# EAGLE board DIYpiano (EAGLE 9.2.2)
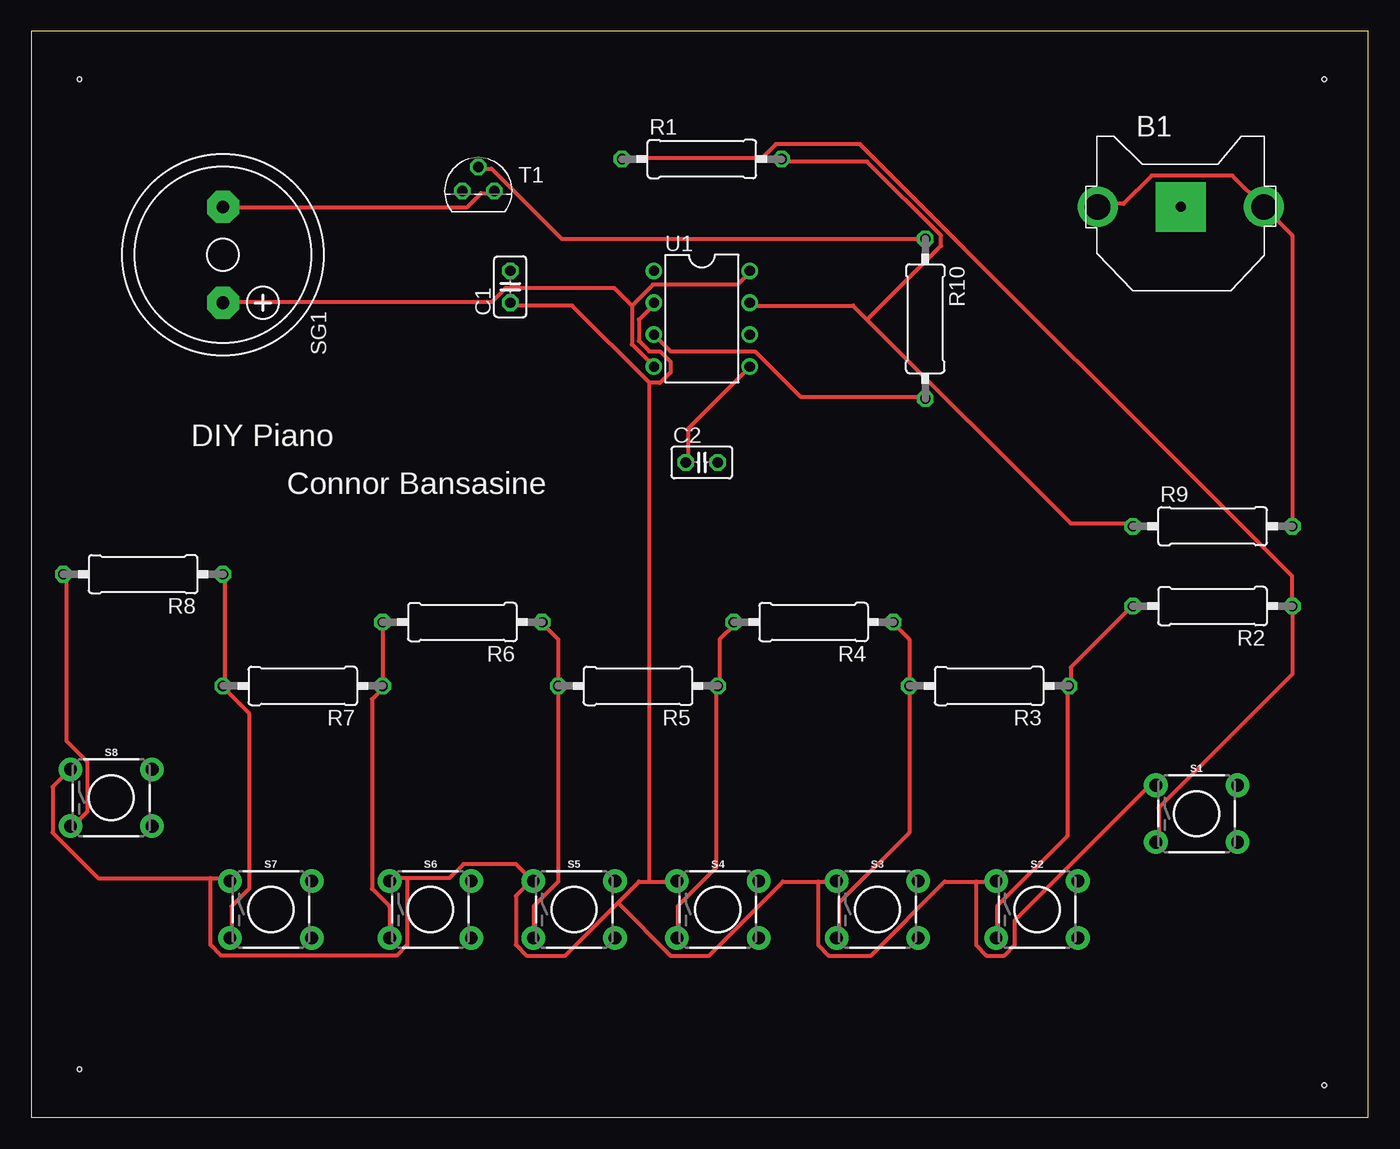
[diagram p0: board, top side]
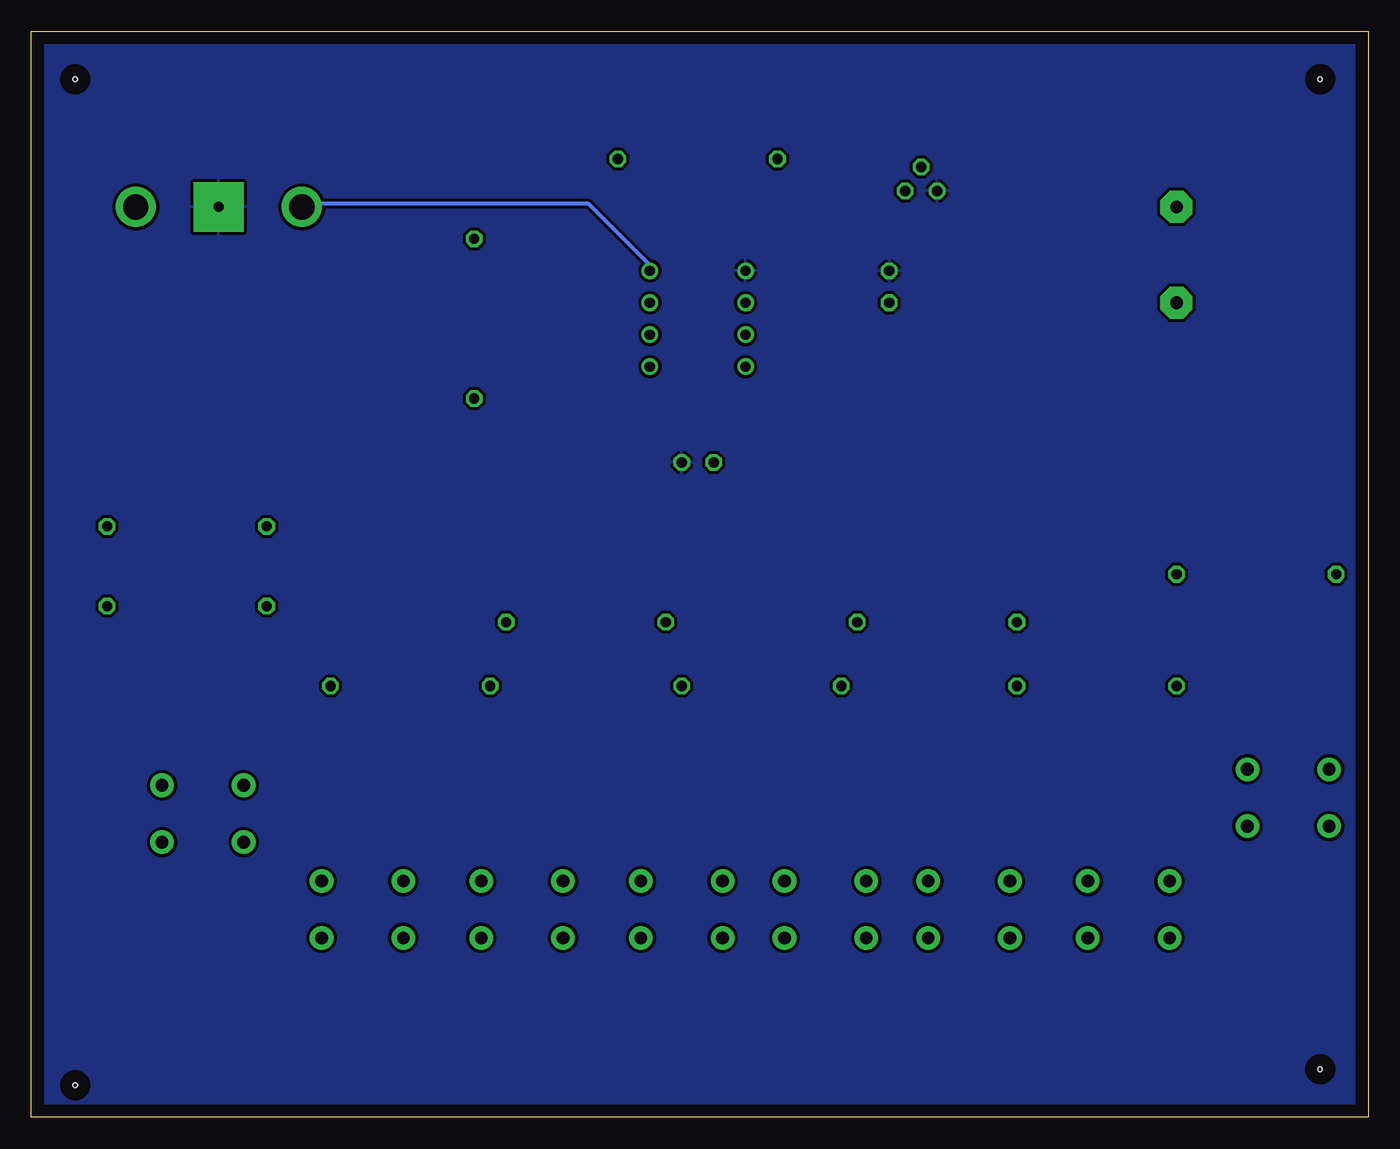
[diagram p1: board, bottom side, seen from below]

Size 106.35 x 86.35 mm. Coordinates in mm from the lower left corner, seen from the top.
Outline: 0,0 106.35,0 106.35,86.35 0,86.35 0,0
Copper layers (1*16): Top 0.035mm / dielectric 1.5mm / Bottom 0.035mm
Design rules "default": minimum track width 6mil, minimum drill 0.35mm, track to track 6mil, track to pad 6mil, pad to pad 6mil, via to via 6mil, smd to smd 6mil, copper to edge 40mil, drill to drill 6mil, minimum pad ring 10mil, minimum via ring 8mil, stop-mask expansion 4mil, vias tented up to drill 0mil, thermal gap 10mil
Net classes: 0 default: width 0.305 mm, drill 0.508 mm, clearance 0.254 mm
Holes 0.35 mm at 3.81,82.55 3.81,3.81 102.87,2.54 102.87,82.55

## Footprints (pad centres in the part's own frame; a part is rotated, then mirrored left to right if it is on the bottom)
CR1220-THM = drill 2 pad 3.175: +1 -6.604,0; +2 6.604,0 | drill 0.8 pad 3.962 square: - 0,0
C025-025X050 = drill 0.813 octagon: 1 -1.27,0; 2 1.27,0
0309/12 = drill 0.813 octagon: 1 -6.35,0; 2 6.35,0
TACTILE_SWITCH_PTH_6.0MM = drill 1.016 pad 1.88: 1 -3.251,2.261; 2 3.251,2.261; 3 -3.251,-2.261; 4 3.251,-2.261
F/HMB = drill 1.016 pad 2.54 octagon: + 3.81,0; - -3.81,0
TO92 = drill 0.813 octagon: 1 1.27,0; 2 0,1.905; 3 -1.27,0
DIL08 = drill 0.813 pad 1.27: 1 -3.81,-3.81; 2 -1.27,-3.81; 3 1.27,-3.81; 4 3.81,-3.81; 5 3.81,3.81; 6 1.27,3.81; 7 -1.27,3.81; 8 -3.81,3.81

## Placement (x,y rotation side)
B1  3V  [CR1220-THM]  91.44,72.39 0 top
C1  [C025-025X050]  38.1,66.04 90 top
C2  [C025-025X050]  53.34,52.07 0 top
R1  6.2k  [0309/12]  53.34,76.2 0 top
R2  390  [0309/12]  93.98,40.64 180 top
R3  910  [0309/12]  76.2,34.29 180 top
R4  1k  [0309/12]  62.23,39.37 180 top
R5  1.1k  [0309/12]  48.26,34.29 180 top
R6  620  [0309/12]  34.29,39.37 180 top
R7  1.3k  [0309/12]  21.59,34.29 180 top
R8  1.5k  [0309/12]  8.89,43.18 180 top
R9  1k  [0309/12]  93.98,46.99 0 top
R10  1k  [0309/12]  71.12,63.5 270 top
S1  MOMENTARY-SWITCH-SPST-PTH-6.0MM  [TACTILE_SWITCH_PTH_6.0MM]  92.71,24.13 0 top
S2  MOMENTARY-SWITCH-SPST-PTH-6.0MM  [TACTILE_SWITCH_PTH_6.0MM]  80.01,16.51 0 top
S3  MOMENTARY-SWITCH-SPST-PTH-6.0MM  [TACTILE_SWITCH_PTH_6.0MM]  67.31,16.51 0 top
S4  MOMENTARY-SWITCH-SPST-PTH-6.0MM  [TACTILE_SWITCH_PTH_6.0MM]  54.61,16.51 0 top
S5  MOMENTARY-SWITCH-SPST-PTH-6.0MM  [TACTILE_SWITCH_PTH_6.0MM]  43.18,16.51 0 top
S6  MOMENTARY-SWITCH-SPST-PTH-6.0MM  [TACTILE_SWITCH_PTH_6.0MM]  31.75,16.51 0 top
S7  MOMENTARY-SWITCH-SPST-PTH-6.0MM  [TACTILE_SWITCH_PTH_6.0MM]  19.05,16.51 0 top
S8  MOMENTARY-SWITCH-SPST-PTH-6.0MM  [TACTILE_SWITCH_PTH_6.0MM]  6.35,25.4 0 top
SG1  F/HMB  [F/HMB]  15.24,68.58 270 top
T1  2N3565  [TO92]  35.56,73.66 0 top
U1  NE555N  [DIL08]  53.34,63.5 270 top

## Library data of the parts
B1 = adafruit; SPICEPREFIX: J
C1 C2 = rcl; SPICEPREFIX: C
R1-R10 = rcl; SPICEPREFIX: R
S1-S8 = SparkFun-Switches; PROD_ID: SWCH-08441; SF_SKU: COM-00097
SG1 = buzzer; OC_FARNELL: unknown; OC_NEWARK: unknown
T1 = transistor
U1 = linear; SPICEPREFIX: X

## Nets
GND: B1.- C1.2 C2.2 T1.3 U1.1
N$1: R5.2 R6.1 S5.3
N$2: R7.2 R8.1 S7.3
N$3: R10.2 U1.3
N$4: R1.2 R9.1 U1.7
N$5: R1.1 R2.1 S1.3
N$6: R2.2 R3.1 S2.3
N$7: R3.2 R4.1 S3.3
N$8: R4.2 R5.1 S4.3
N$9: R6.2 R7.1 S6.3
N$10: R8.2 S8.3
N$11: C2.1 U1.5
N$12: C1.1 S1.1 S2.1 S3.1 S4.1 S5.1 S6.1 S7.1 S8.1 U1.2
N$13: R10.1 T1.2
N$14: SG1.- T1.1
VCC: B1.+1 B1.+2 R9.2 SG1.+ U1.4 U1.8

## Tracks (layer width: path | path; a pad name or v marks a point on that pad's centre or on a via)
GND
  pour Bottom: -3.81,1.27 -3.81,87.63 -2.54,88.9 111.76,88.9 111.76,-1.27 110.49,-2.54 0,-2.54 -2.54,0
N$1
  Top 0.305: R6.1 40.79,39.12 41.91,38 R5.2 41.91,18.72 39.95,16.76 39.95,14.25 S5.3
N$2
  Top 0.305: R8.1 15.37,43.03 15.37,34.37 R7.2 15.37,34.09 17.32,32.13 17.32,18.16 15.93,16.76 15.93,14.25 S7.3
N$3
  Top 0.305: U1.3 50.85,60.91 57.56,60.91 61.19,57.28 70.97,57.28 R10.2
N$4
  Top 0.305: 66.5,63.42 65.38,64.54 57.28,64.54 U1.7 | 66.5,63.42 82.7,47.22 87.45,47.22 R9.1 | 66.5,63.42 72.36,69.29 72.36,70.13 66.5,76 59.79,76 R1.2
N$5
  Top 0.305: R1.1 47.22,76.28 58.12,76.28 59.23,77.39 65.94,77.39 100.31,43.03 100.31,40.79 R2.1 100.31,40.51 100.31,35.2 89.69,24.59 89.69,22.07 S1.3
N$6
  Top 0.305: R2.2 87.45,40.51 82.7,35.76 82.7,34.37 R3.1 82.42,34.09 82.42,22.35 76.83,16.76 76.83,14.25 S2.3
N$7
  Top 0.305: R4.1 68.73,39.12 69.85,38 R3.2 69.85,22.63 64.26,17.04 64.26,14.25 S3.3
N$8
  Top 0.305: R4.2 55.88,39.12 54.76,38 54.76,34.37 R5.1 54.48,34.09 54.48,19.84 51.41,16.76 51.41,14.25 S4.3
N$9
  Top 0.305: R6.2 R7.1 27.94,34.09 27.1,33.25 27.1,18.16 28.5,16.76 S6.3
N$10
  Top 0.305: R8.2 2.79,43.03 2.79,29.9 4.47,28.22 4.47,24.31 3.35,23.19 S8.3
N$11
  Top 0.305: C2.1 52.25,52.25 52.25,54.76 57,59.51 U1.5
N$12
  Top 0.305: 14.25,19 5.31,19 1.68,22.63 1.68,26.26 3.07,27.66 S8.1 | 14.25,19 15.65,19 S7.1 | 49.17,58.4 43.03,64.54 38.28,64.54 C1.1 | 49.17,58.4 50.01,58.4 50.85,59.23 50.85,60.07 50.01,60.91 49.17,60.91 48.34,61.75 48.34,63.42 49.45,64.54 U1.2 | 29.9,19 33.25,19 34.37,20.12 38.56,20.12 39.67,19 S5.1 39.67,18.72 38.56,17.6 38.56,13.69 39.4,12.85 42.47,12.85 46.66,17.04 | 29.9,19 28.5,19 S6.1 | 49.17,18.72 48.34,18.72 46.66,17.04 | 49.17,18.72 51.13,18.72 S4.1 | 62.59,18.72 59.79,18.72 53.92,12.85 50.85,12.85 46.66,17.04 | 62.59,18.72 63.98,18.72 S3.1 | 75.16,18.72 72.64,18.72 66.78,12.85 63.42,12.85 62.59,13.69 62.59,18.72 | 75.16,18.72 76.56,18.72 S2.1 | 75.16,18.72 75.16,13.69 76,12.85 77.39,12.85 78.23,13.69 78.23,15.65 88.85,26.26 89.41,26.26 S1.1 | 49.17,18.72 49.17,58.4 | 14.25,19 14.25,13.69 15.09,12.85 29.06,12.85 29.9,13.69 29.9,19
N$13
  Top 0.305: R10.1 42.19,69.85 36.6,75.44 35.76,75.44 T1.2
N$14
  Top 0.305: T1.1 36.6,73.48 35.76,73.48 34.65,72.36 15.37,72.36 SG1.-
VCC
  Top 0.305: R9.2 100.31,47.22 100.31,70.13 B1.+2 95.56,74.88 89.13,74.88 86.89,72.64 84.94,72.64 B1.+1 | 47.78,64.54 47.78,61.47 49.45,59.79 U1.4 | 47.78,64.54 49.45,66.22 56.16,66.22 57,67.06 U1.8 | 47.78,64.54 46.38,65.94 37.72,65.94 36.6,64.82 15.37,64.82 SG1.+
  Bottom 0.305: B1.+1 84.66,72.64 62.03,72.64 57.28,67.89 57.28,67.33 U1.8

## Text on the board
tPlace: DIY Piano | Connor Bansasine